# Altium PCB 风火轮（单面）.PcbDoc (part 2 of 4)
Units mil, origin at the board's own origin, x right, y up, seen from the top; angles counter-clockwise.
Board outline 3937.01 x 3937.01 mil, 2 copper layers (Top Layer, Bottom Layer); 108 components, 81 nets, 448 pads, 132 vias.
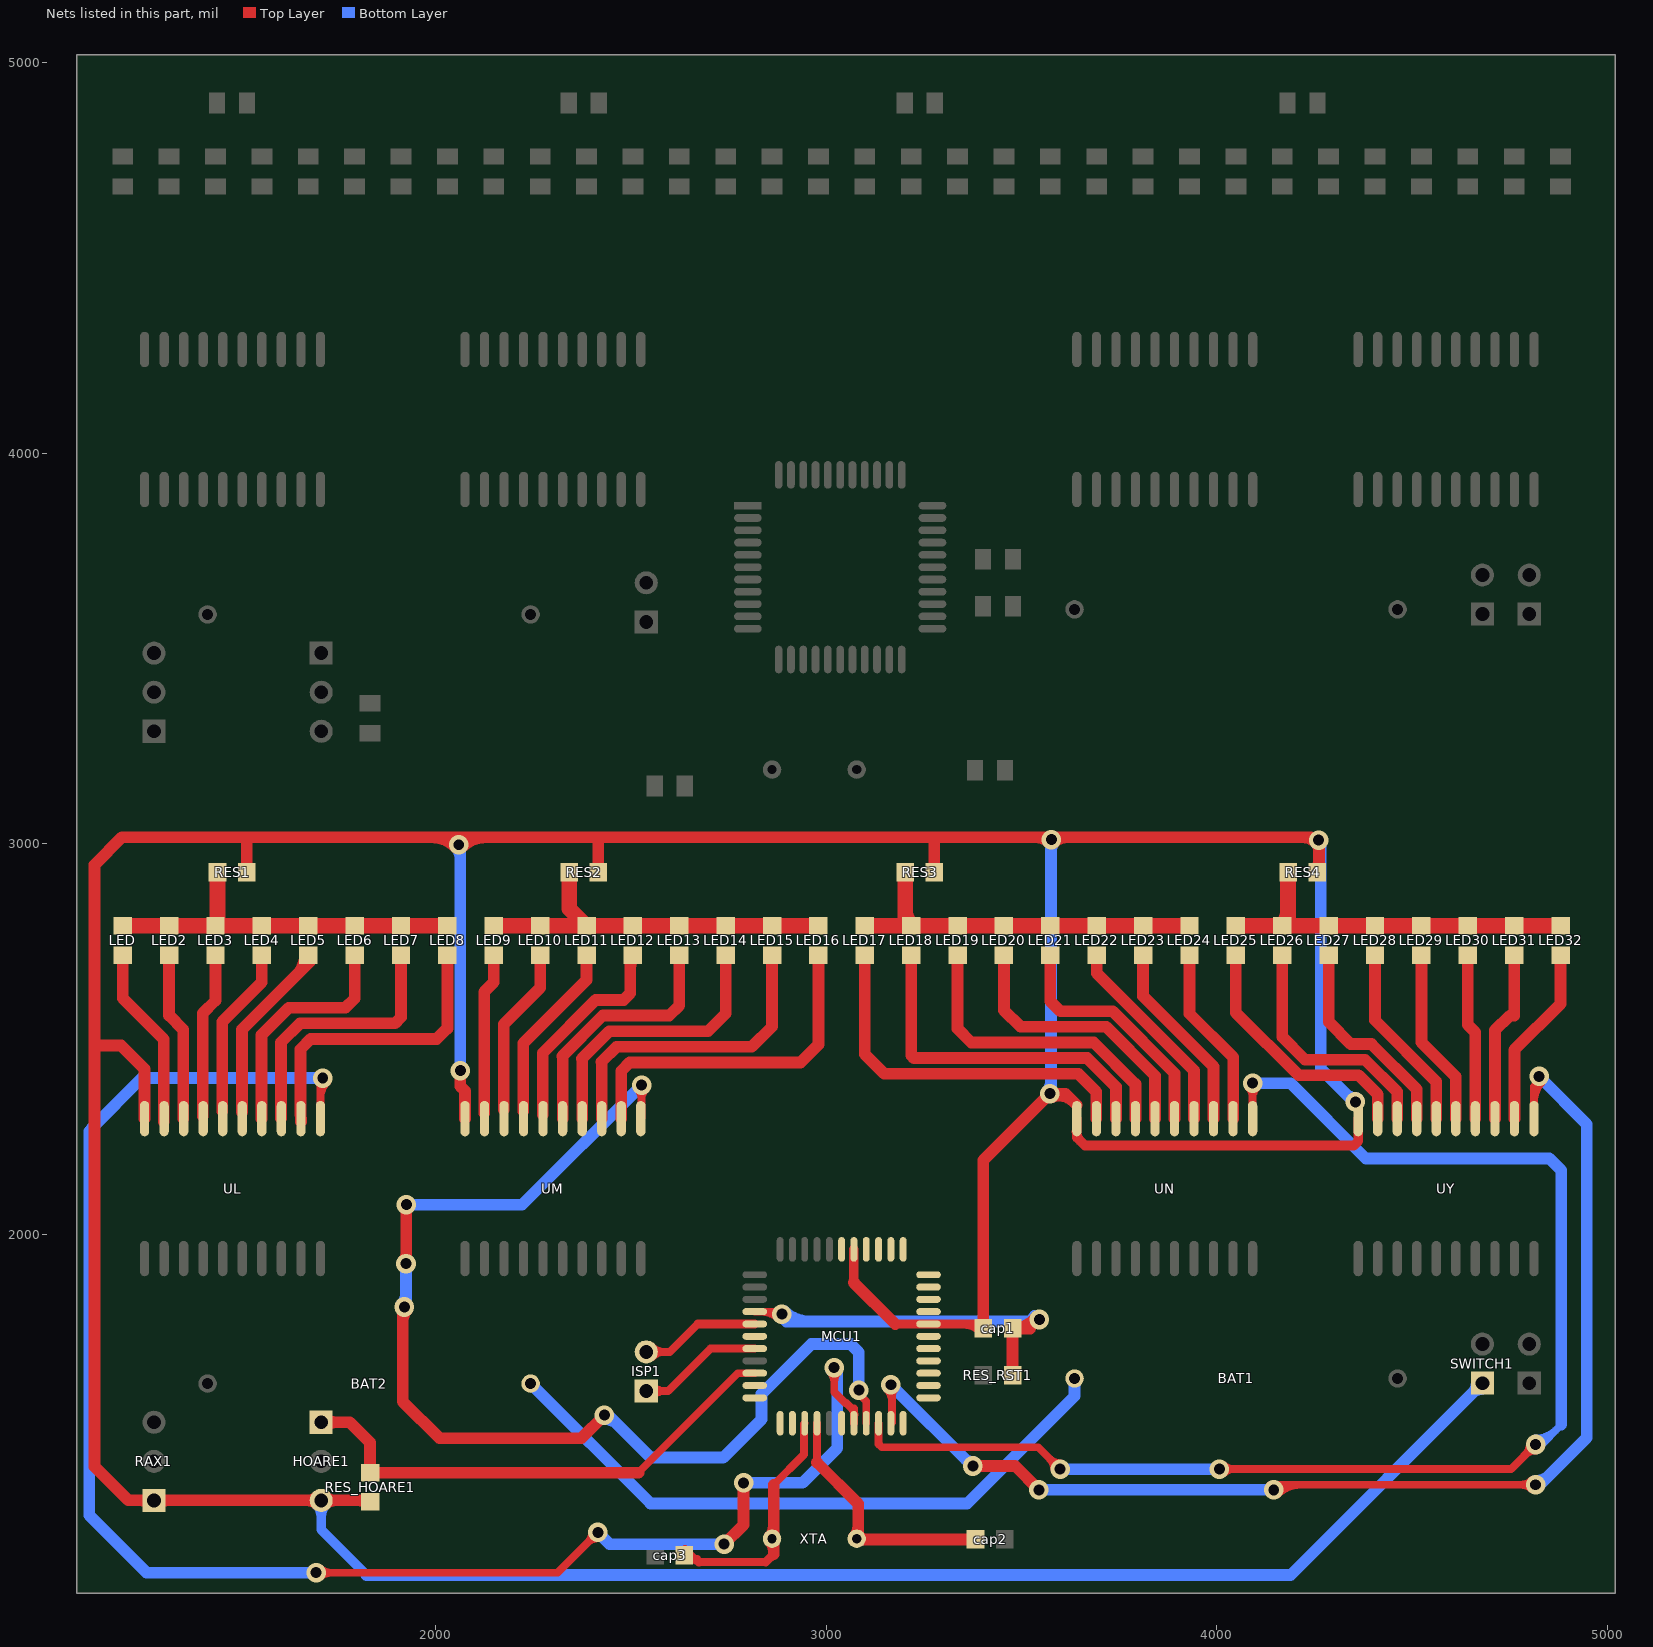
[diagram p2: the nets of this part, all layers, seen from the top]

## Via types
v1: diameter 50, hole 28, Top Layer to Bottom Layer, 132 vias

## Nets (pads, with @x,y where several pads share a name; then routed paths per layer and width w, separated by ;. In a path a pad name is that pad's centre, name@x,y a point inside that pad or via, vN(x,y) a via of type N, cw(c..) or ccw(c..) an arc to the next point about the centre after c; other vN are vias at no path point) (continued)
INTRUPT2: HOARE1.1 MCU1.9 RES_HOARE1.A | length 1534.1
  Top Layer w20: 2519.87,1390.87 2774.51,1645.51 MCU1.9@2817.56,1645.51
  Top Layer w30: HOARE1.1@1708,1520 1781,1520 1833,1468 RES_HOARE1.A@1833,1390.87 2519.87,1390.87 ; HOARE1.1@1718.27,1509.73 cw(c1743.07,1484.93) 1743.07,1520 ; HOARE1.1@1718.27,1509.73 cw(c1743.07,1484.93) 1743.07,1520 ; HOARE1.1@1718.27,1509.73 cw(c1743.07,1484.93) 1743.07,1520 ; HOARE1.1@1718.27,1509.73 cw(c1743.07,1484.93) 1743.07,1520 ; HOARE1.1@1718.27,1530.27 ccw(c1743.07,1555.07) 1743.07,1520 ; HOARE1.1@1718.27,1530.27 ccw(c1743.07,1555.07) 1743.07,1520 ; HOARE1.1@1718.27,1530.27 ccw(c1743.07,1555.07) 1743.07,1520 ; HOARE1.1@1718.27,1530.27 ccw(c1743.07,1555.07) 1743.07,1520
L1: LED.K UL.19 | length 470.1
  Top Layer w30: LED.K@1200,2715.63 1200,2605 1305,2500 UL.19@1305,2289
L2: LED2.K UL.18 | length 433.5
  Top Layer w30: LED2.K@1318.71,2715.63 1318.71,2561.29 1355,2525 UL.18@1355,2297.13
L3: LED3.K UL.17 | length 426.1
  Top Layer w30: UL.17@1405,2303 1405,2567 1437.42,2599.42 LED3.K@1437.42,2715.63
L4: LED4.K UL.16 | length 441.5
  Top Layer w30: UL.16@1455,2316 1455,2545 1556.13,2646.13 LED4.K@1556.13,2715.63
L5: LED5.K UL.15 | length 703.8
  Top Layer w30: UL.15@1505,2314 1505,2525 1681,2701 1674.84,2701 LED5.K@1674.84,2715.63 ; 1645.42,2665.42 ccw(c1595.2,2715.63) LED5.K@1666.22,2715.63 ; 1645.42,2665.42 ccw(c1595.2,2715.63) LED5.K@1666.22,2715.63 ; 1645.42,2665.42 ccw(c1595.2,2715.63) LED5.K@1666.22,2715.63 ; 1645.42,2665.42 ccw(c1595.2,2715.63) LED5.K@1666.22,2715.63
L6: LED6.K UL.14 | length 602.2
  Top Layer w30: UL.14@1555,2297.13 1555,2511 1625,2581 1770,2581 1793.55,2604.55 LED6.K@1793.55,2715.63
L7: LED7.K UL.13 | length 687.2
  Top Layer w30: UL.13@1605,2298 1605,2492 1654,2541 1897,2541 1912.26,2556.26 LED7.K@1912.26,2715.63
L8: LED8.K UL.12 | length 761.5
  Top Layer w30: UL.12@1655,2307 1655,2474.66 1681.34,2501 2004,2501 2030.97,2527.97 LED8.K@2030.97,2715.63 ; UL.12@1656,2289 UL.12@1656,2297.13
M1: LED9.K UM.19 | length 414.9
  Top Layer w30: UM.19@2125,2311 2125,2621.32 2149.68,2646 LED9.K@2149.68,2715.63
M2: LED10.K UM.18 | length 434.3
  Top Layer w30: UM.18@2175,2320 2175,2539 2268.39,2632.39 LED10.K@2268.39,2715.63
M3: LED11.K UM.17 | length 466.8
  Top Layer w30: UM.17@2225,2316 2225,2490 2387.1,2652.1 LED11.K@2387.1,2715.63
M4: LED12.K UM.16 | length 662.6
  Top Layer w30: UM.16@2275,2307 2275,2465 2411,2601 2482,2601 2499,2618 2499,2708.82 LED12.K@2505.81,2715.63 ; 2499,2684.09 cw(c2536.17,2684.09) LED12.K@2509.89,2710.37 ; 2499,2684.09 cw(c2536.17,2684.09) LED12.K@2509.89,2710.37 ; 2499,2684.09 cw(c2536.17,2684.09) LED12.K@2509.89,2710.37 ; 2499,2684.09 cw(c2536.17,2684.09) LED12.K@2509.89,2710.37
M5: LED13.K UM.15 | length 642.1
  Top Layer w30: 2325,2457 2429,2561 2599,2561 2624.52,2586.52 LED13.K@2624.52,2715.63 ; UM.15@2326,2297.13 2326,2457
M6: LED14.K UM.14 | length 718.9
  Top Layer w30: 2375,2450.43 2445.57,2521 2698,2521 2743.22,2566.22 LED14.K@2743.22,2715.63 ; UM.14@2376,2297.13 2376,2450.43
M7: LED15.K UM.13 | length 802.2
  Top Layer w30: 2425,2442 2464,2481 2810,2481 2861.93,2532.93 LED15.K@2861.93,2715.63 ; UM.13@2426,2297.13 2426,2442
M8: LED16.K UM.12 | length 932.4
  Top Layer w30: 2476,2346 UM.12@2476,2297.13 2476,2419 2498,2441 2935,2441 2980.64,2486.64 LED16.K@2980.64,2715.63
N1: LED17.K UN.19 | length 955.1
  Top Layer w30: LED17.K@3099.35,2715.63 3099.35,2461.65 3149,2412 3646,2412 3692,2366 UN.19@3692,2297.13
N2: LED18.K UN.18 | length 895.6
  Top Layer w30: LED18.K@3218.06,2715.63 3218.06,2458.94 3225,2452 3669,2452 3742,2379 UN.18@3742,2297.13
N3: LED19.K UN.17 | length 790.7
  Top Layer w30: LED19.K@3336.77,2715.63 3336.77,2527.23 3372,2492 3685.57,2492 3792,2385.57 UN.17@3792,2297.13
N4: LED20.K UN.16 | length 706.9
  Top Layer w30: LED20.K@3455.48,2715.63 3455.48,2574.52 3498,2532 3717,2532 3842,2407 UN.16@3842,2297.13
N5: LED21.K UN.15 | length 628.4
  Top Layer w30: LED21.K@3574.19,2715.63 3574.19,2597.81 3600,2572 3733.57,2572 3892,2413.57 UN.15@3892,2297.13
N6: LED22.K UN.14 | length 521.7
  Top Layer w30: LED22.K@3692.9,2715.63 3692.9,2669.24 3942,2420.14 UN.14@3942,2297.13
N7: LED23.K UN.13 | length 493.2
  Top Layer w30: LED23.K@3811.61,2715.63 3811.61,2610.39 3992,2430 UN.13@3992,2297.13
N8: LED24.K UN.12 | length 464.8
  Top Layer w30: LED24.K@3930.32,2715.63 3930.32,2565.68 4042,2454 UN.12@4042,2297.13
NetBAT1_2: BAT1.K BAT2.A | length 1678.2
  Bottom Layer w30: BAT2.A@2244,1619 2551,1312 3361,1312 3636.23,1587.23 BAT1.K@3636.23,1632
NetLED1_1: LED2.A LED3.A LED4.A LED5.A LED6.A LED7.A LED8.A LED.A RES1.K | length 963.4
  Top Layer w40: LED.A@1200,2790.43 LED2.A@1318.71,2790.43 LED3.A@1437.42,2790.43 LED4.A@1556.13,2790.43 LED5.A@1674.84,2790.43 LED6.A@1793.55,2790.43 LED7.A@1912.26,2790.43 LED8.A@2030.97,2790.43 ; LED3.A@1442.6,2795.61 RES1.K@1442.6,2928
NetLED9_1: LED9.A LED10.A LED11.A LED12.A LED13.A LED14.A LED15.A LED16.A RES2.K | length 987
  Top Layer w40: LED9.A@2149.68,2790.43 LED10.A@2268.39,2790.43 LED11.A@2387.1,2790.43 ; RES2.K@2342.6,2928 2342.6,2834.93 LED11.A@2387.1,2790.43 ; LED16.A@2980.64,2790.43 LED15.A@2861.93,2790.43 LED14.A@2743.22,2790.43 LED13.A@2624.52,2790.43 LED12.A@2505.81,2790.43 LED11.A@2387.1,2790.43
NetLED17_1: LED17.A LED18.A LED19.A LED20.A LED21.A LED22.A LED23.A LED24.A RES3.K | length 1124.8
  Top Layer w40: LED17.A@3099.35,2790.43 LED18.A@3218.06,2790.43 LED19.A@3336.77,2790.43 LED20.A@3455.48,2790.43 LED21.A@3574.19,2790.43 LED22.A@3692.9,2790.43 LED23.A@3811.61,2790.43 LED24.A@3930.32,2790.43 ; LED18.A@3202.6,2805.9 RES3.K@3202.6,2928 ; 3202.6,2830.81 ccw(c3257.26,2830.81) LED18.A@3218.61,2792.16 ; 3202.6,2830.81 ccw(c3257.26,2830.81) LED18.A@3218.61,2792.16 ; 3202.6,2830.81 ccw(c3257.26,2830.81) LED18.A@3218.61,2792.16 ; 3202.6,2830.81 ccw(c3257.26,2830.81) LED18.A@3218.61,2792.16
NetLED25_1: LED25.A LED26.A LED27.A LED28.A LED29.A LED30.A LED31.A LED32.A RES4.K | length 1118.9
  Top Layer w40: LED25.A@4049.03,2790.43 LED26.A@4167.74,2790.43 LED27.A@4286.45,2790.43 LED28.A@4405.16,2790.43 LED29.A@4523.87,2790.43 LED30.A@4642.58,2790.43 LED31.A@4761.29,2790.43 LED32.A@4880,2790.43 ; LED26.A@4182.6,2805.29 RES4.K@4182.6,2928 ; LED26.A@4167.2,2792.16 ccw(c4130.01,2829.35) 4182.6,2829.35 ; LED26.A@4167.2,2792.16 ccw(c4130.01,2829.35) 4182.6,2829.35 ; LED26.A@4167.2,2792.16 ccw(c4130.01,2829.35) 4182.6,2829.35 ; LED26.A@4167.2,2792.16 ccw(c4130.01,2829.35) 4182.6,2829.35
P00: MCU1.37
P01: MCU1.36
P02: MCU1.35
P03: MCU1.34
P04: MCU1.33
P05: MCU1.32
P06: MCU1.31
P07: MCU1.30
P20: MCU1.18 UL.11 | length 5447.5
  Top Layer w20: v1(1695,1135) 2313,1135 v1(2416,1238) ; UL.11@1706,2297.13 1706,2395 v1(1712,2401) v1@1712,2392 ; v1(3021,1660) 3021,1597.36 3049.31,1569.05 ; 3051.95,1569.05 3066.01,1555 ; MCU1.18@3071.5,1517.56 3071.5,1555 ; v1@1705.61,1124.39 cw(c1731.21,1098.79) 1731.21,1135 ; v1@1705.61,1124.39 cw(c1731.21,1098.79) 1731.21,1135 ; v1@1705.61,1124.39 cw(c1731.21,1098.79) 1731.21,1135 ; v1@1705.61,1124.39 cw(c1731.21,1098.79) 1731.21,1135 ; v1@1705.61,1145.61 ccw(c1731.21,1171.21) 1731.21,1135 ; v1@1705.61,1145.61 ccw(c1731.21,1171.21) 1731.21,1135 ; v1@1705.61,1145.61 ccw(c1731.21,1171.21) 1731.21,1135 ; v1@1705.61,1145.61 ccw(c1731.21,1171.21) 1731.21,1135 ; 1706,2350.3 cw(c1762.7,2350.3) v1@1722.61,2390.39 ; 1706,2350.3 cw(c1762.7,2350.3) v1@1722.61,2390.39 ; 1706,2350.3 cw(c1762.7,2350.3) v1@1722.61,2390.39 ; 1706,2350.3 cw(c1762.7,2350.3) v1@1722.61,2390.39 ; 2390.39,1212.39 cw(c2416,1186.79) v1@2416,1223 ; 2390.39,1212.39 ccw(c2364.79,1238) v1@2401,1238 ; 2390.39,1212.39 cw(c2416,1186.79) v1@2416,1223 ; 2390.39,1212.39 ccw(c2364.79,1238) v1@2401,1238 ; 2390.39,1212.39 cw(c2416,1186.79) v1@2416,1223 ; 2390.39,1212.39 ccw(c2364.79,1238) v1@2401,1238 ; 2390.39,1212.39 cw(c2416,1186.79) v1@2416,1223 ; 2390.39,1212.39 ccw(c2364.79,1238) v1@2401,1238 ; v1@3010.39,1649.39 cw(c2984.79,1623.79) 3021,1623.79 ; v1@3010.39,1649.39 cw(c2984.79,1623.79) 3021,1623.79 ; v1@3010.39,1649.39 cw(c2984.79,1623.79) 3021,1623.79 ; v1@3010.39,1649.39 cw(c2984.79,1623.79) 3021,1623.79 ; 3021,1623.79 cw(c3057.21,1623.79) v1@3031.61,1649.39 ; 3021,1623.79 cw(c3057.21,1623.79) v1@3031.61,1649.39 ; 3021,1623.79 cw(c3057.21,1623.79) v1@3031.61,1649.39 ; 3021,1623.79 cw(c3057.21,1623.79) v1@3031.61,1649.39 ; 3066.86,1554.15 cw(c3052.9,1540.2) MCU1.18@3072.64,1540.2 ; 3066.86,1554.15 cw(c3052.9,1540.2) MCU1.18@3072.64,1540.2 ; 3066.86,1554.15 cw(c3052.9,1540.2) MCU1.18@3072.64,1540.2 ; 3066.86,1554.15 cw(c3052.9,1540.2) MCU1.18@3072.64,1540.2 ; 3066.86,1554.15 cw(c3052.9,1540.2) MCU1.18@3072.64,1540.2 ; 3066.86,1554.15 cw(c3052.9,1540.2) MCU1.18@3072.64,1540.2 ; 3066.86,1554.15 cw(c3052.9,1540.2) MCU1.18@3072.64,1540.2 ; 3066.86,1554.15 cw(c3052.9,1540.2) MCU1.18@3072.64,1540.2
  Top Layer w30: v1(2739,1208) 2789,1258 v1(2789,1365)
  Bottom Layer w20: v1@1712,2392 v1(1712,2401)
  Bottom Layer w30: 1114,2265 1114,1282 1261,1135 v1(1695,1135) ; 1119.29,2269.71 1119.29,2271.13 1249.15,2401 v1@1692.97,2401 ; v1(2416,1238) 2446,1208 v1(2739,1208) ; v1(2789,1365) 2940,1365 3029,1454 3029,1652 v1(3021,1660) ; v1@3013.93,1652.93 cw(c2977.54,1616.54) 3029,1616.54 ; v1@3013.93,1652.93 cw(c2977.54,1616.54) 3029,1616.54 ; v1@3013.93,1652.93 cw(c2977.54,1616.54) 3029,1616.54 ; v1@3013.93,1652.93 cw(c2977.54,1616.54) 3029,1616.54
P21: MCU1.19 UM.11 | length 3636.5
  Top Layer w20: UM.11@2528,2299.13 v1(2528,2383) ; v1@3082,1594.36 3102.99,1573.37 MCU1.19@3102.99,1517.56 ; v1@2517.39,2372.39 cw(c2491.79,2346.79) 2528,2346.79 ; v1@2517.39,2372.39 cw(c2491.79,2346.79) 2528,2346.79 ; v1@2517.39,2372.39 cw(c2491.79,2346.79) 2528,2346.79 ; v1@2517.39,2372.39 cw(c2491.79,2346.79) 2528,2346.79 ; 2528,2346.79 cw(c2564.21,2346.79) v1@2538.61,2372.39 ; 2528,2346.79 cw(c2564.21,2346.79) v1@2538.61,2372.39 ; 2528,2346.79 cw(c2564.21,2346.79) v1@2538.61,2372.39 ; 2528,2346.79 cw(c2564.21,2346.79) v1@2538.61,2372.39
  Top Layer w30: v1(1921,1815) 1917,1811 1917,1573 2011,1479 2374,1479 v1(2433,1538) ; v1@1926,1938 v1(1926,2077) ; 1917,1781.2 cw(c1954.8,1781.2) v1@1928.07,1807.93 ; 1917,1781.2 cw(c1954.8,1781.2) v1@1928.07,1807.93 ; 1917,1781.2 cw(c1954.8,1781.2) v1@1928.07,1807.93 ; 1917,1781.2 cw(c1954.8,1781.2) v1@1928.07,1807.93 ; v1@1917.93,1933.07 ccw(c1898.44,1952.56) 1926,1952.56 ; v1@1917.93,1933.07 ccw(c1898.44,1952.56) 1926,1952.56 ; v1@1917.93,1933.07 ccw(c1898.44,1952.56) 1926,1952.56 ; v1@1917.93,1933.07 ccw(c1898.44,1952.56) 1926,1952.56
  Bottom Layer w20: v1@1925,1803 v1@1925,1815
  Bottom Layer w30: v1@1925,1815 v1(1925,1926) ; v1(1926,2077) 2222,2077 v1(2528,2383) ; v1@2443,1538 2551.5,1429.5 2736.5,1429.5 2835,1528 2835,1593 2962,1720 3063,1720 3084,1699 v1(3084,1602) ; v1@1913.93,1822.07 ccw(c1887.2,1848.8) 1925,1848.8 ; v1@1913.93,1822.07 ccw(c1887.2,1848.8) 1925,1848.8 ; v1@1913.93,1822.07 ccw(c1887.2,1848.8) 1925,1848.8 ; v1@1913.93,1822.07 ccw(c1887.2,1848.8) 1925,1848.8 ; v1@2433,1528 cw(c2433,1479.72) 2467.14,1513.86 ; v1@2433,1528 cw(c2433,1479.72) 2467.14,1513.86 ; v1@2433,1528 cw(c2433,1479.72) 2467.14,1513.86 ; v1@2433,1528 cw(c2433,1479.72) 2467.14,1513.86
P22: MCU1.20 UN.11 | length 4629.9
  Top Layer w20: MCU1.20@3134.49,1517.56 3134.49,1464.51 3143,1456 3543,1456 v1(3599,1400) ; v1(4007,1400) 4753,1400 v1(4816,1463) ; UN.11@4092,2297.13 v1(4092,2388) ; 3573.39,1425.61 cw(c3547.79,1400) v1@3584,1400 ; 3573.39,1425.61 ccw(c3599,1451.21) v1@3599,1415 ; 3573.39,1425.61 cw(c3547.79,1400) v1@3584,1400 ; 3573.39,1425.61 ccw(c3599,1451.21) v1@3599,1415 ; 3573.39,1425.61 cw(c3547.79,1400) v1@3584,1400 ; 3573.39,1425.61 ccw(c3599,1451.21) v1@3599,1415 ; 3573.39,1425.61 cw(c3547.79,1400) v1@3584,1400 ; 3573.39,1425.61 ccw(c3599,1451.21) v1@3599,1415 ; v1@4017.61,1389.39 cw(c4043.21,1363.79) 4043.21,1400 ; v1@4017.61,1389.39 cw(c4043.21,1363.79) 4043.21,1400 ; v1@4017.61,1389.39 cw(c4043.21,1363.79) 4043.21,1400 ; v1@4017.61,1389.39 cw(c4043.21,1363.79) 4043.21,1400 ; v1@4017.61,1410.61 ccw(c4043.21,1436.21) 4043.21,1400 ; v1@4017.61,1410.61 ccw(c4043.21,1436.21) 4043.21,1400 ; v1@4017.61,1410.61 ccw(c4043.21,1436.21) 4043.21,1400 ; v1@4017.61,1410.61 ccw(c4043.21,1436.21) 4043.21,1400 ; v1@4081.39,2377.39 cw(c4055.79,2351.79) 4092,2351.79 ; v1@4081.39,2377.39 cw(c4055.79,2351.79) 4092,2351.79 ; v1@4081.39,2377.39 cw(c4055.79,2351.79) 4092,2351.79 ; v1@4081.39,2377.39 cw(c4055.79,2351.79) 4092,2351.79 ; 4092,2351.79 cw(c4128.21,2351.79) v1@4102.61,2377.39 ; 4092,2351.79 cw(c4128.21,2351.79) v1@4102.61,2377.39 ; 4092,2351.79 cw(c4128.21,2351.79) v1@4102.61,2377.39 ; 4092,2351.79 cw(c4128.21,2351.79) v1@4102.61,2377.39 ; 4790.39,1437.39 cw(c4816,1411.79) v1@4816,1448 ; 4790.39,1437.39 ccw(c4764.79,1463) v1@4801,1463 ; 4790.39,1437.39 cw(c4816,1411.79) v1@4816,1448 ; 4790.39,1437.39 ccw(c4764.79,1463) v1@4801,1463 ; 4790.39,1437.39 cw(c4816,1411.79) v1@4816,1448 ; 4790.39,1437.39 ccw(c4764.79,1463) v1@4801,1463 ; 4790.39,1437.39 cw(c4816,1411.79) v1@4816,1448 ; 4790.39,1437.39 ccw(c4764.79,1463) v1@4801,1463
  Bottom Layer w20: v1@4826,1458 4882,1514 ; v1@4816,1478 ccw(c4816,1550.43) 4867.21,1499.21 ; v1@4816,1478 ccw(c4816,1550.43) 4867.21,1499.21 ; v1@4816,1478 ccw(c4816,1550.43) 4867.21,1499.21 ; v1@4816,1478 ccw(c4816,1550.43) 4867.21,1499.21
  Bottom Layer w30: v1(3599,1400) v1(4007,1400) ; v1(4092,2388) 4189,2388 4382,2195 4851,2195 4851,2196 4882,2165 4882,1514
P23: MCU1.21 UY.11 | length 4242.8
  Top Layer w20: MCU1.21@3168.62,1519.05 v1@3168.62,1616 ; v1@4138,1360 v1(4816,1360) ; UY.11@4812,2297.13 4812,2379 ; v1@3155.39,1605.39 cw(c3123.46,1573.46) 3168.62,1573.46 ; v1@3155.39,1605.39 cw(c3123.46,1573.46) 3168.62,1573.46 ; v1@3155.39,1605.39 cw(c3123.46,1573.46) 3168.62,1573.46 ; v1@3155.39,1605.39 cw(c3123.46,1573.46) 3168.62,1573.46 ; 3168.62,1586.12 cw(c3195.88,1586.12) v1@3176.61,1605.39 ; 3168.62,1586.12 cw(c3195.88,1586.12) v1@3176.61,1605.39 ; 3168.62,1586.12 cw(c3195.88,1586.12) v1@3176.61,1605.39 ; 3168.62,1586.12 cw(c3195.88,1586.12) v1@3176.61,1605.39 ; v1@4156.61,1336.39 cw(c4213.6,1279.4) 4213.6,1360 ; v1@4156.61,1336.39 cw(c4213.6,1279.4) 4213.6,1360 ; v1@4156.61,1336.39 cw(c4213.6,1279.4) 4213.6,1360 ; v1@4156.61,1336.39 cw(c4213.6,1279.4) 4213.6,1360 ; 4779.79,1360 cw(c4779.79,1323.79) v1@4805.39,1349.39 ; 4779.79,1360 ccw(c4779.79,1396.21) v1@4805.39,1370.61 ; 4779.79,1360 cw(c4779.79,1323.79) v1@4805.39,1349.39 ; 4779.79,1360 ccw(c4779.79,1396.21) v1@4805.39,1370.61 ; 4779.79,1360 cw(c4779.79,1323.79) v1@4805.39,1349.39 ; 4779.79,1360 ccw(c4779.79,1396.21) v1@4805.39,1370.61 ; 4779.79,1360 cw(c4779.79,1323.79) v1@4805.39,1349.39 ; 4779.79,1360 ccw(c4779.79,1396.21) v1@4805.39,1370.61 ; UY.11@4812,2337.4 cw(c4892.6,2337.4) v1@4835.61,2394.39 ; UY.11@4812,2337.4 cw(c4892.6,2337.4) v1@4835.61,2394.39 ; UY.11@4812,2337.4 cw(c4892.6,2337.4) v1@4835.61,2394.39
  Top Layer w30: v1(3376,1408) 3484,1408 v1(3545,1347)
  Bottom Layer w30: v1(3166,1616) v1@3375,1407 ; v1(3545,1347) v1(4146,1347) ; v1(4825,2405) 4947,2283 4947,1480 v1@4826,1359 ; 3355.51,1426.49 ccw(c3376,1446.97) v1@3376,1418 ; 3355.51,1426.49 ccw(c3376,1446.97) v1@3376,1418 ; 3355.51,1426.49 ccw(c3376,1446.97) v1@3376,1418 ; 3355.51,1426.49 ccw(c3376,1446.97) v1@3376,1418 ; v1@4816,1370 ccw(c4816,1420.7) 4851.85,1384.85 ; v1@4816,1370 ccw(c4816,1420.7) 4851.85,1384.85 ; v1@4816,1370 ccw(c4816,1420.7) 4851.85,1384.85 ; v1@4816,1370 ccw(c4816,1420.7) 4851.85,1384.85
P24: MCU1.22
P25: MCU1.23
P26: MCU1.24
P27: MCU1.25
P30: ISP1.2 MCU1.5 | length 603.4
  Top Layer w20: ISP1.2@2540,1700 2600,1700 2671.5,1771.5 ; ISP1.2@2553.81,1686.19 cw(c2587.14,1652.86) 2587.14,1700 ; ISP1.2@2553.81,1686.19 cw(c2587.14,1652.86) 2587.14,1700 ; ISP1.2@2553.81,1686.19 cw(c2587.14,1652.86) 2587.14,1700 ; ISP1.2@2553.81,1686.19 cw(c2587.14,1652.86) 2587.14,1700 ; ISP1.2@2553.81,1713.81 ccw(c2587.14,1747.14) 2587.14,1700 ; ISP1.2@2553.81,1713.81 ccw(c2587.14,1747.14) 2587.14,1700 ; ISP1.2@2553.81,1713.81 ccw(c2587.14,1747.14) 2587.14,1700 ; ISP1.2@2553.81,1713.81 ccw(c2587.14,1747.14) 2587.14,1700
  Top Layer w22: 2671.5,1771.5 MCU1.5@2817.56,1771.5
P31: ISP1.1 MCU1.7 | length 618.7
  Top Layer w20: ISP1.1@2540,1600 2596,1600 2704.5,1708.5 MCU1.7@2817.56,1708.5 ; ISP1.1@2553.81,1586.19 cw(c2587.14,1552.86) 2587.14,1600 ; ISP1.1@2553.81,1586.19 cw(c2587.14,1552.86) 2587.14,1600 ; ISP1.1@2553.81,1586.19 cw(c2587.14,1552.86) 2587.14,1600 ; ISP1.1@2553.81,1586.19 cw(c2587.14,1552.86) 2587.14,1600 ; ISP1.1@2553.81,1613.81 ccw(c2587.14,1647.14) 2587.14,1600 ; ISP1.1@2553.81,1613.81 ccw(c2587.14,1647.14) 2587.14,1600 ; ISP1.1@2553.81,1613.81 ccw(c2587.14,1647.14) 2587.14,1600 ; ISP1.1@2553.81,1613.81 ccw(c2587.14,1647.14) 2587.14,1600
P34: MCU1.10
P35: MCU1.11
P36: MCU1.12
P37: MCU1.13
P40: MCU1.17
P41: MCU1.28
P42: MCU1.39
P43: MCU1.6
P44: MCU1.26
P45: MCU1.27
RST: cap1.A MCU1.4 RES_RST1.K | length 1788.7
  Top Layer w20: MCU1.4@2817.56,1802.99 2881.01,1802.99 v1(2887,1797) ; MCU1.4@2836.32,1802.99 cw(c2836.32,1746.32) v1@2876.39,1786.39 ; MCU1.4@2836.32,1802.99 cw(c2836.32,1746.32) v1@2876.39,1786.39 ; MCU1.4@2836.32,1802.99 cw(c2836.32,1746.32) v1@2876.39,1786.39 ; MCU1.4@2836.32,1802.99 cw(c2836.32,1746.32) v1@2876.39,1786.39
  Top Layer w30: RES_RST1.K@3477.4,1640 cap1.A@3477.4,1760 ; 3523,1760 cap1.A@3477.4,1760 ; cap1.A@3477.4,1760 ccw(c3477.41,1837.79) v1@3538.19,1789.24 ; cap1.A@3477.4,1760 ccw(c3477.41,1837.79) v1@3538.19,1789.24 ; cap1.A@3477.4,1760 ccw(c3477.41,1837.79) v1@3538.19,1789.24 ; cap1.A@3477.4,1760 ccw(c3477.41,1837.79) v1@3538.19,1789.24
  Bottom Layer w20: v1(2887,1797) v1@2898,1778 ; 3517,1778 3532,1797 v1(3546,1783)
  Bottom Layer w30: v1@2898,1778 3517,1778 ; v1@2894.07,1804.07 ccw(c2957.01,1867.01) 2957.01,1778 ; v1@2894.07,1804.07 ccw(c2957.01,1867.01) 2957.01,1778 ; v1@2894.07,1804.07 ccw(c2957.01,1867.01) 2957.01,1778 ; v1@2894.07,1804.07 ccw(c2957.01,1867.01) 2957.01,1778 ; 3509.79,1778 ccw(c3509.79,1819.21) v1@3538.93,1790.07 ; 3509.79,1778 ccw(c3509.79,1819.21) v1@3538.93,1790.07 ; 3509.79,1778 ccw(c3509.79,1819.21) v1@3538.93,1790.07 ; 3509.79,1778 ccw(c3509.79,1819.21) v1@3538.93,1790.07
VCC: cap1.K HOARE1.3 MCU1.29 MCU1.38 RAX1.1 RES1.A RES2.A RES3.A RES4.A RES_HOARE1.K SWITCH1.1 UL.20 UM.20 UN.20 UY.20 | length 17214
  Top Layer w20: cap1.K@3391.1,1771.5 cap1.K@3402.6,1760
  Top Layer w24: 3071.5,1877.5 MCU1.38@3071.5,1962.44 ; 3177.5,1771.5 MCU1.29@3262.44,1771.5 cap1.K@3391.1,1771.5 ; 3352.49,1771.5 cw(c3352.49,1711.07) cap1.K@3395.22,1753.8 ; 3352.49,1771.5 cw(c3352.49,1711.07) cap1.K@3395.22,1753.8 ; 3352.49,1771.5 cw(c3352.49,1711.07) cap1.K@3395.22,1753.8 ; 3352.49,1771.5 cw(c3352.49,1711.07) cap1.K@3395.22,1753.8
  Top Layer w25: UN.20@3642,2297.13 3642,2249 3663,2228 3678.04,2228 3678.54,2228.5 3705.46,2228.5 3705.96,2228 4351,2228 4362,2239 UY.20@4362,2297.13 ; UN.20@3641.31,2263.67 ccw(c3675.06,2263.67) 3651.2,2239.8 ; UN.20@3641.31,2263.67 ccw(c3675.06,2263.67) 3651.2,2239.8 ; UN.20@3641.31,2263.67 ccw(c3675.06,2263.67) 3651.2,2239.8 ; UN.20@3641.31,2263.67 ccw(c3675.06,2263.67) 3651.2,2239.8
  Top Layer w30: 1130,2484 1196,2484 1256,2424 UL.20@1256,2297.13 ; RES1.A@1517.4,2928 1517.4,3017 ; RES_HOARE1.K@1829.06,1320 HOARE1.3@1708,1320 RAX1.1@1280,1320 1214,1320 1128,1406 1128,2947 1198,3017 2417.4,3017 ; v1(2064,2420) 2064,2380 2076,2368 UM.20@2076,2297.13 ; RES2.A@2417.4,2928 2417.4,3017 ; 3071.5,1877.5 3177.5,1771.5 ; RES3.A@3277.4,2928 3277.4,3015.4 ; cap1.K@3402.6,1760 3402.6,2190.6 v1(3573,2361) 3613,2361 UN.20@3642,2332 ; RES4.A@4257.4,2928 4262,2932.6 4262,2996 4241,3017 2417.4,3017 ; 1244.93,1320 cw(c1244.93,1284.93) RAX1.1@1269.73,1309.73 ; 1244.93,1320 ccw(c1244.93,1355.07) RAX1.1@1269.73,1330.27 ; 1244.93,1320 cw(c1244.93,1284.93) RAX1.1@1269.73,1309.73 ; 1244.93,1320 ccw(c1244.93,1355.07) RAX1.1@1269.73,1330.27 ; 1244.93,1320 cw(c1244.93,1284.93) RAX1.1@1269.73,1309.73 ; 1244.93,1320 ccw(c1244.93,1355.07) RAX1.1@1269.73,1330.27 ; 1244.93,1320 cw(c1244.93,1284.93) RAX1.1@1269.73,1309.73 ; 1244.93,1320 ccw(c1244.93,1355.07) RAX1.1@1269.73,1330.27 ; RAX1.1@1290.27,1309.73 cw(c1315.07,1284.93) 1315.07,1320 ; RAX1.1@1290.27,1309.73 cw(c1315.07,1284.93) 1315.07,1320 ; RAX1.1@1290.27,1309.73 cw(c1315.07,1284.93) 1315.07,1320 ; RAX1.1@1290.27,1309.73 cw(c1315.07,1284.93) 1315.07,1320 ; RAX1.1@1290.27,1330.27 ccw(c1315.07,1355.07) 1315.07,1320 ; RAX1.1@1290.27,1330.27 ccw(c1315.07,1355.07) 1315.07,1320 ; RAX1.1@1290.27,1330.27 ccw(c1315.07,1355.07) 1315.07,1320 ; RAX1.1@1290.27,1330.27 ccw(c1315.07,1355.07) 1315.07,1320 ; 1672.93,1320 cw(c1672.93,1284.93) HOARE1.3@1697.73,1309.73 ; 1672.93,1320 ccw(c1672.93,1355.07) HOARE1.3@1697.73,1330.27 ; 1672.93,1320 cw(c1672.93,1284.93) HOARE1.3@1697.73,1309.73 ; 1672.93,1320 ccw(c1672.93,1355.07) HOARE1.3@1697.73,1330.27 ; 1672.93,1320 cw(c1672.93,1284.93) HOARE1.3@1697.73,1309.73 ; 1672.93,1320 ccw(c1672.93,1355.07) HOARE1.3@1697.73,1330.27 ; 1672.93,1320 cw(c1672.93,1284.93) HOARE1.3@1697.73,1309.73 ; 1672.93,1320 ccw(c1672.93,1355.07) HOARE1.3@1697.73,1330.27 ; HOARE1.3@1718.27,1309.73 cw(c1743.07,1284.93) 1743.07,1320 ; HOARE1.3@1718.27,1309.73 cw(c1743.07,1284.93) 1743.07,1320 ; HOARE1.3@1718.27,1309.73 cw(c1743.07,1284.93) 1743.07,1320 ; HOARE1.3@1718.27,1309.73 cw(c1743.07,1284.93) 1743.07,1320 ; HOARE1.3@1718.27,1330.27 ccw(c1743.07,1355.07) 1743.07,1320 ; HOARE1.3@1718.27,1330.27 ccw(c1743.07,1355.07) 1743.07,1320 ; HOARE1.3@1718.27,1330.27 ccw(c1743.07,1355.07) 1743.07,1320 ; HOARE1.3@1718.27,1330.27 ccw(c1743.07,1355.07) 1743.07,1320 ; 1804.35,1320 cw(c1804.35,1288.59) RES_HOARE1.K@1826.56,1310.8 ; 1804.35,1320 cw(c1804.35,1288.59) RES_HOARE1.K@1826.56,1310.8 ; 1804.35,1320 cw(c1804.35,1288.59) RES_HOARE1.K@1826.56,1310.8 ; 1804.35,1320 cw(c1804.35,1288.59) RES_HOARE1.K@1826.56,1310.8 ; 1989.99,3017 cw(c1989.99,2927.99) v1@2052.93,2990.93 ; 1989.99,3017 cw(c1989.99,2927.99) v1@2052.93,2990.93 ; 1989.99,3017 cw(c1989.99,2927.99) v1@2052.93,2990.93 ; 1989.99,3017 cw(c1989.99,2927.99) v1@2052.93,2990.93 ; v1@2067.07,2990.93 cw(c2130.01,2927.99) 2130.01,3017 ; v1@2067.07,2990.93 cw(c2130.01,2927.99) 2130.01,3017 ; v1@2067.07,2990.93 cw(c2130.01,2927.99) 2130.01,3017 ; v1@2067.07,2990.93 cw(c2130.01,2927.99) 2130.01,3017 ; 3538.37,3017 cw(c3538.37,2972.37) v1@3569.93,3003.93 ; 3538.37,3017 cw(c3538.37,2972.37) v1@3569.93,3003.93 ; 3538.37,3017 cw(c3538.37,2972.37) v1@3569.93,3003.93 ; 3538.37,3017 cw(c3538.37,2972.37) v1@3569.93,3003.93 ; v1@3576.94,2351.81 cw(c3596.98,2304.99) 3633,2341 ; v1@3576.94,2351.81 cw(c3596.98,2304.99) 3633,2341 ; v1@3576.94,2351.81 cw(c3596.98,2304.99) 3633,2341 ; v1@3576.94,2351.81 cw(c3596.98,2304.99) 3633,2341 ; v1@3584.07,3003.93 cw(c3615.63,2972.37) 3615.63,3017 ; v1@3584.07,3003.93 cw(c3615.63,2972.37) 3615.63,3017 ; v1@3584.07,3003.93 cw(c3615.63,2972.37) 3615.63,3017 ; v1@3584.07,3003.93 cw(c3615.63,2972.37) 3615.63,3017 ; 4219.96,3017 cw(c4219.96,2968.96) v1@4253.93,3002.93 ; 4219.96,3017 cw(c4219.96,2968.96) v1@4253.93,3002.93 ; 4219.96,3017 cw(c4219.96,2968.96) v1@4253.93,3002.93 ; 4219.96,3017 cw(c4219.96,2968.96) v1@4253.93,3002.93 ; RES4.A@4252.14,2934.44 ccw(c4228.34,2958.25) 4262,2958.25 ; RES4.A@4252.14,2934.44 ccw(c4228.34,2958.25) 4262,2958.25 ; RES4.A@4252.14,2934.44 ccw(c4228.34,2958.25) 4262,2958.25 ; RES4.A@4252.14,2934.44 ccw(c4228.34,2958.25) 4262,2958.25 ; v1@4253.93,3002.93 cw(c4234.44,2983.44) 4262,2983.44 ; v1@4253.93,3002.93 cw(c4234.44,2983.44) 4262,2983.44 ; v1@4253.93,3002.93 cw(c4234.44,2983.44) 4262,2983.44 ; v1@4253.93,3002.93 cw(c4234.44,2983.44) 4262,2983.44
  Bottom Layer w25: HOARE1.3@1708,1320 1708,1245 1824,1129 ; HOARE1.3@1695.96,1307.96 cw(c1666.89,1278.89) 1708,1278.89 ; HOARE1.3@1695.96,1307.96 cw(c1666.89,1278.89) 1708,1278.89 ; HOARE1.3@1695.96,1307.96 cw(c1666.89,1278.89) 1708,1278.89 ; HOARE1.3@1695.96,1307.96 cw(c1666.89,1278.89) 1708,1278.89 ; 1708,1278.89 cw(c1749.11,1278.89) HOARE1.3@1720.04,1307.96 ; 1708,1278.89 cw(c1749.11,1278.89) HOARE1.3@1720.04,1307.96 ; 1708,1278.89 cw(c1749.11,1278.89) HOARE1.3@1720.04,1307.96 ; 1708,1278.89 cw(c1749.11,1278.89) HOARE1.3@1720.04,1307.96
  Bottom Layer w30: 1824,1129 4189,1129 SWITCH1.1@4680,1620 ; v1(2064,2420) v1@2064,2998 ; v1@3576,2361 v1@3576,3011 ; v1(3577,3011) 3577,3017 v1@3581,3017 ; v1@4266,3003 4266,2425 v1@4353,2338 ; v1@2052.93,2990.93 cw(c2026.2,2964.2) 2064,2964.2 ; v1@2052.93,2990.93 cw(c2026.2,2964.2) 2064,2964.2 ; v1@2052.93,2990.93 cw(c2026.2,2964.2) 2064,2964.2 ; v1@2052.93,2990.93 cw(c2026.2,2964.2) 2064,2964.2 ; v1@3565.93,2368.07 ccw(c3541.62,2392.38) 3576,2392.38 ; v1@3565.93,2368.07 ccw(c3541.62,2392.38) 3576,2392.38 ; v1@3565.93,2368.07 ccw(c3541.62,2392.38) 3576,2392.38 ; v1@3565.93,2368.07 ccw(c3541.62,2392.38) 3576,2392.38 ; 3576,2984.44 cw(c3603.56,2984.44) v1@3584.07,3003.93 ; 3576,2984.44 cw(c3603.56,2984.44) v1@3584.07,3003.93 ; 3576,2984.44 cw(c3603.56,2984.44) v1@3584.07,3003.93 ; 3576,2984.44 cw(c3603.56,2984.44) v1@3584.07,3003.93 ; v1@4253.93,3002.93 cw(c4224.79,2973.79) 4266,2973.79 ; v1@4253.93,3002.93 cw(c4224.79,2973.79) 4266,2973.79 ; v1@4253.93,3002.93 cw(c4224.79,2973.79) 4266,2973.79 ; v1@4253.93,3002.93 cw(c4224.79,2973.79) 4266,2973.79 ; 4331.1,2359.9 ccw(c4355,2383.8) v1@4355,2350 ; 4331.1,2359.9 ccw(c4355,2383.8) v1@4355,2350 ; 4331.1,2359.9 ccw(c4355,2383.8) v1@4355,2350 ; 4331.1,2359.9 ccw(c4355,2383.8) v1@4355,2350 ; SWITCH1.1@4655.2,1595.2 cw(c4680,1570.4) SWITCH1.1@4680,1605.47 ; SWITCH1.1@4655.2,1595.2 ccw(c4630.4,1620) SWITCH1.1@4665.47,1620 ; SWITCH1.1@4655.2,1595.2 cw(c4680,1570.4) SWITCH1.1@4680,1605.47 ; SWITCH1.1@4655.2,1595.2 ccw(c4630.4,1620) SWITCH1.1@4665.47,1620 ; SWITCH1.1@4655.2,1595.2 cw(c4680,1570.4) SWITCH1.1@4680,1605.47 ; SWITCH1.1@4655.2,1595.2 ccw(c4630.4,1620) SWITCH1.1@4665.47,1620 ; SWITCH1.1@4655.2,1595.2 cw(c4680,1570.4) SWITCH1.1@4680,1605.47 ; SWITCH1.1@4655.2,1595.2 ccw(c4630.4,1620) SWITCH1.1@4665.47,1620
  other v1: 4355,2340 2060,2998 4261,3010
XTAL1: cap2.K MCU1.15 XTA.2 | length 844.3
  Top Layer w20: 2977.01,1416.99 MCU1.15@2977.01,1517.56 ; XTA.2@3078.54,1222 3080.54,1220 3082.54,1220 XTA.2@3082.54,1217
  Top Layer w30: 2977.01,1416.99 3082.54,1311.46 3082.54,1220 cap2.K@3382.6,1220 ; XTA.2@3072.44,1228.1 ccw(c3048.06,1252.47) 3082.54,1252.47 ; XTA.2@3072.44,1228.1 ccw(c3048.06,1252.47) 3082.54,1252.47 ; XTA.2@3072.44,1228.1 ccw(c3048.06,1252.47) 3082.54,1252.47 ; XTA.2@3072.44,1228.1 ccw(c3048.06,1252.47) 3082.54,1252.47 ; XTA.2@3084.63,1228.1 ccw(c3104.18,1247.64) 3104.18,1220 ; XTA.2@3084.63,1228.1 ccw(c3104.18,1247.64) 3104.18,1220 ; XTA.2@3084.63,1228.1 ccw(c3104.18,1247.64) 3104.18,1220 ; XTA.2@3084.63,1228.1 ccw(c3104.18,1247.64) 3104.18,1220
XTAL2: cap3.K MCU1.14 XTA.1 | length 1318.9
  Top Layer w20: 2670.5,1164.5 2665.4,1169.6 ; 2846,1162 2678.1,1162 2670.5,1169.6 ; 2866,1360 2943.5,1437.5 2943.5,1515.55 MCU1.14@2945.51,1517.56 ; cap3.K@2641.86,1167.21 cw(c2652.94,1138.36) 2674.79,1160.21 ; cap3.K@2641.86,1167.21 cw(c2652.94,1138.36) 2674.79,1160.21 ; cap3.K@2641.86,1167.21 cw(c2652.94,1138.36) 2674.79,1160.21 ; cap3.K@2641.86,1167.21 cw(c2652.94,1138.36) 2674.79,1160.21 ; cap3.K@2648.8,1183.8 ccw(c2670.5,1193.27) 2670.5,1169.6 ; cap3.K@2648.8,1183.8 ccw(c2670.5,1193.27) 2670.5,1169.6 ; cap3.K@2648.8,1183.8 ccw(c2670.5,1193.27) 2670.5,1169.6 ; cap3.K@2648.8,1183.8 ccw(c2670.5,1193.27) 2670.5,1169.6 ; cap3.K@2649.44,1181.94 ccw(c2665.4,1186.08) 2665.4,1169.6 ; cap3.K@2649.44,1181.94 ccw(c2665.4,1186.08) 2665.4,1169.6 ; cap3.K@2649.44,1181.94 ccw(c2665.4,1186.08) 2665.4,1169.6 ; cap3.K@2649.44,1181.94 ccw(c2665.4,1186.08) 2665.4,1169.6 ; cap3.K@2649.44,1181.94 ccw(c2665.4,1186.08) 2665.4,1169.6 ; cap3.K@2649.44,1181.94 ccw(c2665.4,1186.08) 2665.4,1169.6 ; cap3.K@2649.44,1181.94 ccw(c2665.4,1186.08) 2665.4,1169.6 ; cap3.K@2649.44,1181.94 ccw(c2665.4,1186.08) 2665.4,1169.6 ; 2665.4,1169.6 2639.4,1169.6 2639.4,1195.6 2665.4,1169.6 ; 2665.4,1169.6 2670.5,1169.6
  Top Layer w22: 2846,1162 2866,1182
  Top Layer w30: 2866,1182 2866,1360 ; XTA.1@2855.9,1215.9 cw(c2831.53,1191.53) 2866,1191.53 ; XTA.1@2855.9,1215.9 cw(c2831.53,1191.53) 2866,1191.53 ; XTA.1@2855.9,1215.9 cw(c2831.53,1191.53) 2866,1191.53 ; XTA.1@2855.9,1215.9 cw(c2831.53,1191.53) 2866,1191.53 ; XTA.1@2855.9,1228.1 ccw(c2831.53,1252.47) 2866,1252.47 ; XTA.1@2855.9,1228.1 ccw(c2831.53,1252.47) 2866,1252.47 ; XTA.1@2855.9,1228.1 ccw(c2831.53,1252.47) 2866,1252.47 ; XTA.1@2855.9,1228.1 ccw(c2831.53,1252.47) 2866,1252.47
Y1: LED25.K UY.19 | length 658.8
  Top Layer w30: LED25.K@4049.03,2715.63 4049.03,2568.4 4209.43,2408 4363,2408 4412,2359 UY.19@4412,2297.13
Y2: LED26.K UY.18 | length 630.3
  Top Layer w30: LED26.K@4167.74,2715.63 4167.74,2506.26 4226,2448 4379.57,2448 4462,2365.57 UY.18@4462,2297.13
Y3: LED27.K UY.17 | length 543
  Top Layer w30: LED27.K@4286.45,2715.63 4286.45,2544.55 4343,2488 4396.14,2488 4512,2372.14 UY.17@4512,2297.13
Y4: LED28.K UY.16 | length 483.5
  Top Layer w30: LED28.K@4405.16,2715.63 4405.16,2548.84 4562,2392 UY.16@4562,2297.13
Y5: LED29.K UY.15 | length 455
  Top Layer w30: LED29.K@4523.87,2715.63 4523.87,2492.87 4612,2404.74 UY.15@4612,2297.13
Y6: LED30.K UY.14 | length 426.5
  Top Layer w30: LED30.K@4642.58,2715.63 4642.58,2537.42 4662,2518 UY.14@4662,2297.13
Y7: LED31.K UY.13 | length 445.7
  Top Layer w30: UY.13@4712,2297.13 4712,2523 4749.71,2560.71 4761.29,2560.71 LED31.K@4761.29,2715.63
Y8: LED32.K UY.12 | length 467.4
  Top Layer w30: UY.12@4762,2297.13 4762,2473 4880,2591 LED32.K@4880,2715.63
pads on no net: BAT1_1.A BAT1_1.K BAT2_1.A BAT2_1.K cap1_1.1 cap1_1.2 cap2_1.1 cap2_1.2 cap3_1.1 cap3_1.2 HOARE1_1.1 HOARE1_1.2 HOARE1_1.3 ISP1_1.1 ISP1_1.2 LED2.1 LED2.2 LED3.1 LED3.2 LED4.1 LED4.2 LED5.1 LED5.2 LED6.1 LED6.2 LED7.1 LED7.2 LED8.1 LED8.2 LED9.1 LED9.2 LED10.1 LED10.2 LED11.1 LED11.2 LED12.1 LED12.2 LED13.1 LED13.2 LED14.1 LED14.2 LED15.1 LED15.2 LED16.1 LED16.2 LED17.1 LED17.2 LED18.1 LED18.2 LED19.1 LED19.2 LED20.1 LED20.2 LED21.1 LED21.2 LED22.1 LED22.2 LED23.1 LED23.2 LED24.1 LED24.2 LED25.1 LED25.2 LED26.1 LED26.2 LED27.1 LED27.2 LED28.1 LED28.2 LED29.1 LED29.2 LED30.1 LED30.2 LED31.1 LED31.2 LED32.1 LED32.2 LED_1.1 LED_1.2 MCU1_1.1 MCU1_1.2 MCU1_1.3 MCU1_1.4 MCU1_1.5 MCU1_1.6 MCU1_1.7 MCU1_1.8 MCU1_1.9 MCU1_1.10 MCU1_1.11 MCU1_1.12 MCU1_1.13 MCU1_1.14 MCU1_1.15 MCU1_1.16 MCU1_1.17 MCU1_1.18 MCU1_1.19 MCU1_1.20 MCU1_1.21 MCU1_1.22 MCU1_1.23 MCU1_1.24 MCU1_1.25 MCU1_1.26 MCU1_1.27 MCU1_1.28 MCU1_1.29 MCU1_1.30 MCU1_1.31 MCU1_1.32 MCU1_1.33 MCU1_1.34 MCU1_1.35 MCU1_1.36 MCU1_1.37 MCU1_1.38 MCU1_1.39 MCU1_1.40 MCU1_1.41 MCU1_1.42 MCU1_1.43 MCU1_1.44 P_GND_1.1 P_GND_1.2 RAX1_1.1 RAX1_1.2 RAX1_1.3 RES1_1.1 RES1_1.2 RES2_1.1 RES2_1.2 RES3_1.1 RES3_1.2 RES4_1.1 RES4_1.2 RES_HOARE1_1.1 RES_HOARE1_1.2 RES_RST1_1.1 RES_RST1_1.2 SWITCH1_1.1 SWITCH1_1.2 UL_1.1 UL_1.2 UL_1.3 UL_1.4 UL_1.5 UL_1.6 UL_1.7 UL_1.8 UL_1.9 UL_1.10 UL_1.11 UL_1.12 UL_1.13 UL_1.14 UL_1.15 UL_1.16 UL_1.17 UL_1.18 UL_1.19 UL_1.20 UM_1.1 UM_1.2 UM_1.3 UM_1.4 UM_1.5 UM_1.6 UM_1.7 UM_1.8 UM_1.9 UM_1.10 UM_1.11 UM_1.12 UM_1.13 UM_1.14 UM_1.15 UM_1.16 UM_1.17 UM_1.18 UM_1.19 UM_1.20 UN_1.1 UN_1.2 UN_1.3 UN_1.4 UN_1.5 UN_1.6 UN_1.7 UN_1.8 UN_1.9 UN_1.10 UN_1.11 UN_1.12 UN_1.13 UN_1.14 UN_1.15 UN_1.16 UN_1.17 UN_1.18 UN_1.19 UN_1.20 UY_1.1 UY_1.2 UY_1.3 UY_1.4 UY_1.5 UY_1.6 UY_1.7 UY_1.8 UY_1.9 UY_1.10 UY_1.11 UY_1.12 UY_1.13 UY_1.14 UY_1.15 UY_1.16 UY_1.17 UY_1.18 UY_1.19 UY_1.20 XTA_1.1 XTA_1.2